# Altium PCB PCB2.PcbDoc
Units mil, origin at the board's own origin, x right, y up, seen from the top; angles counter-clockwise.
Board outline 6000 x 4000 mil, 2 copper layers (Top Layer, Bottom Layer); 80 components, 14 nets, 268 pads, 0 vias.
Unrouted connection lines stored in the file: 4.
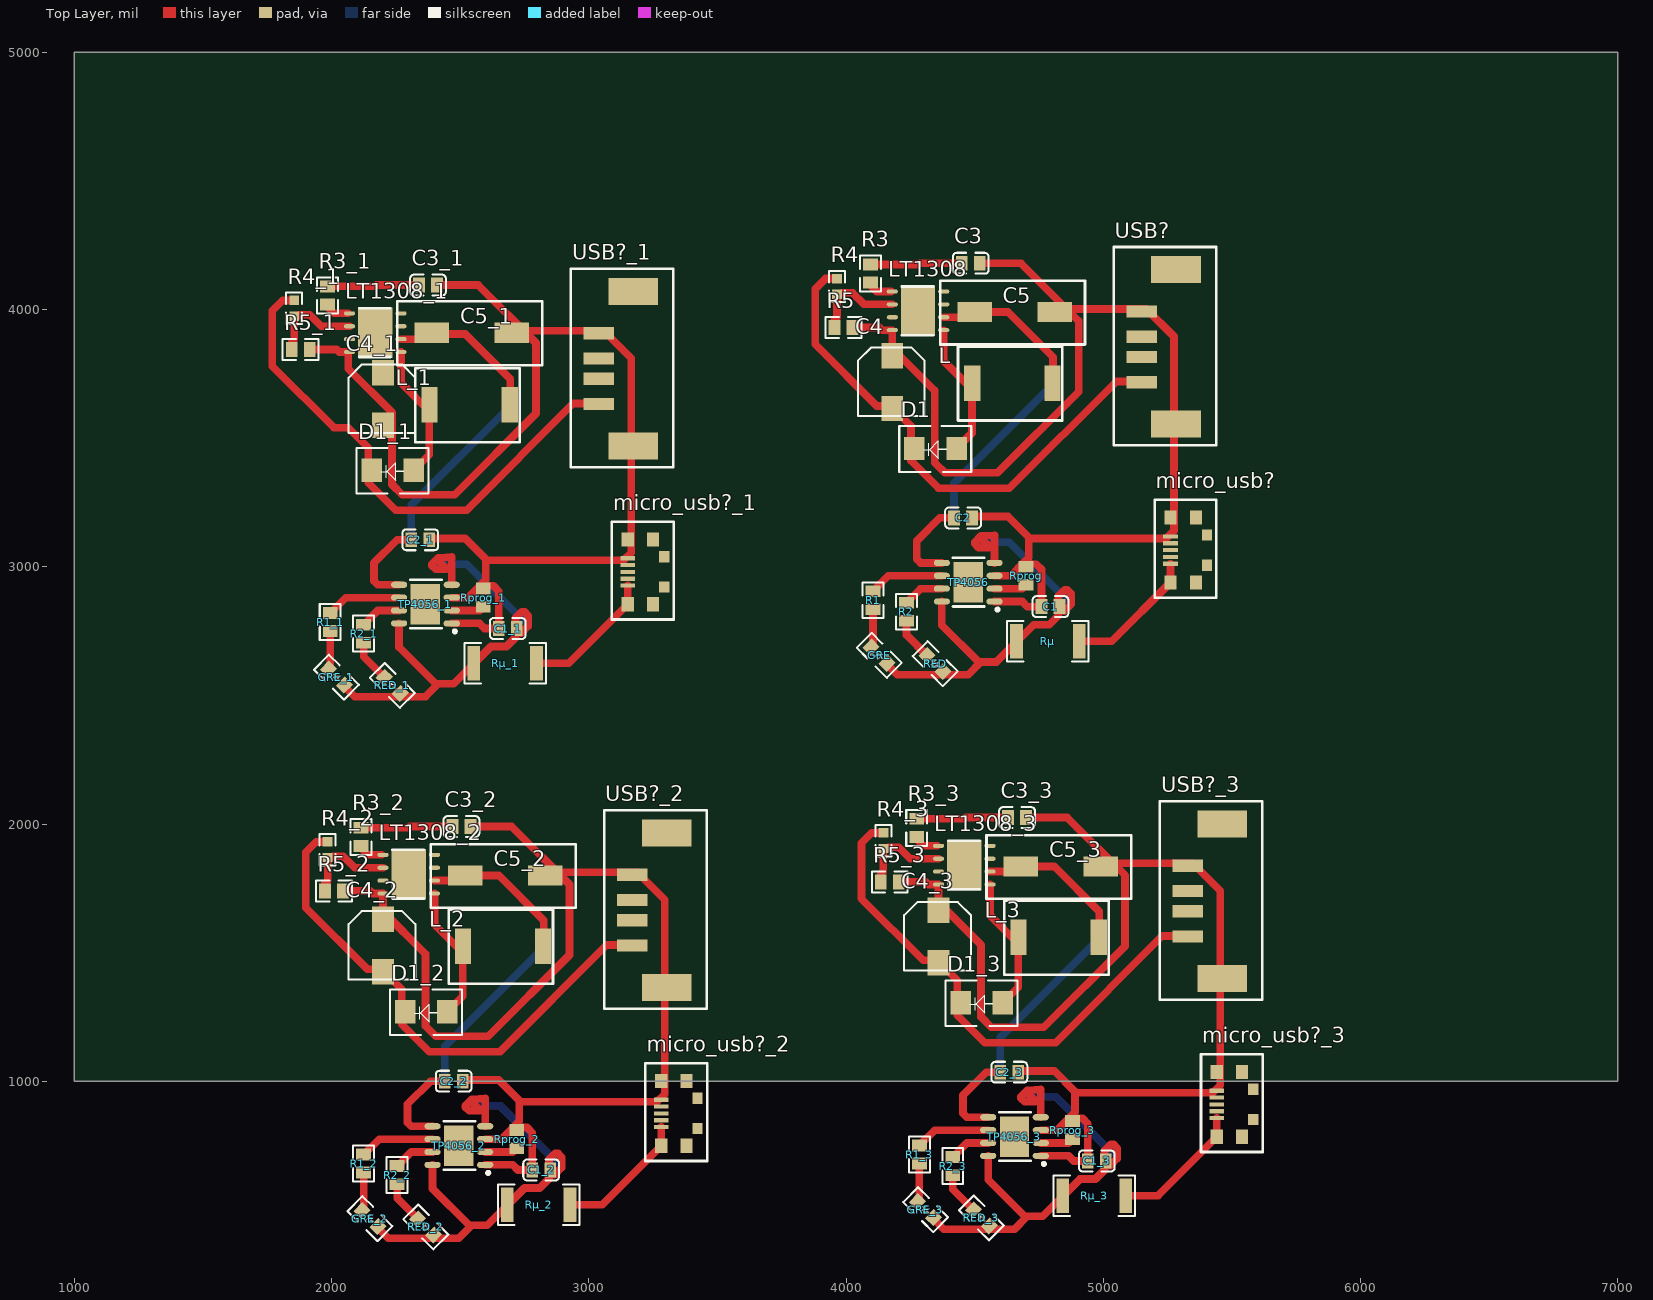
[diagram p0: Top Layer view]
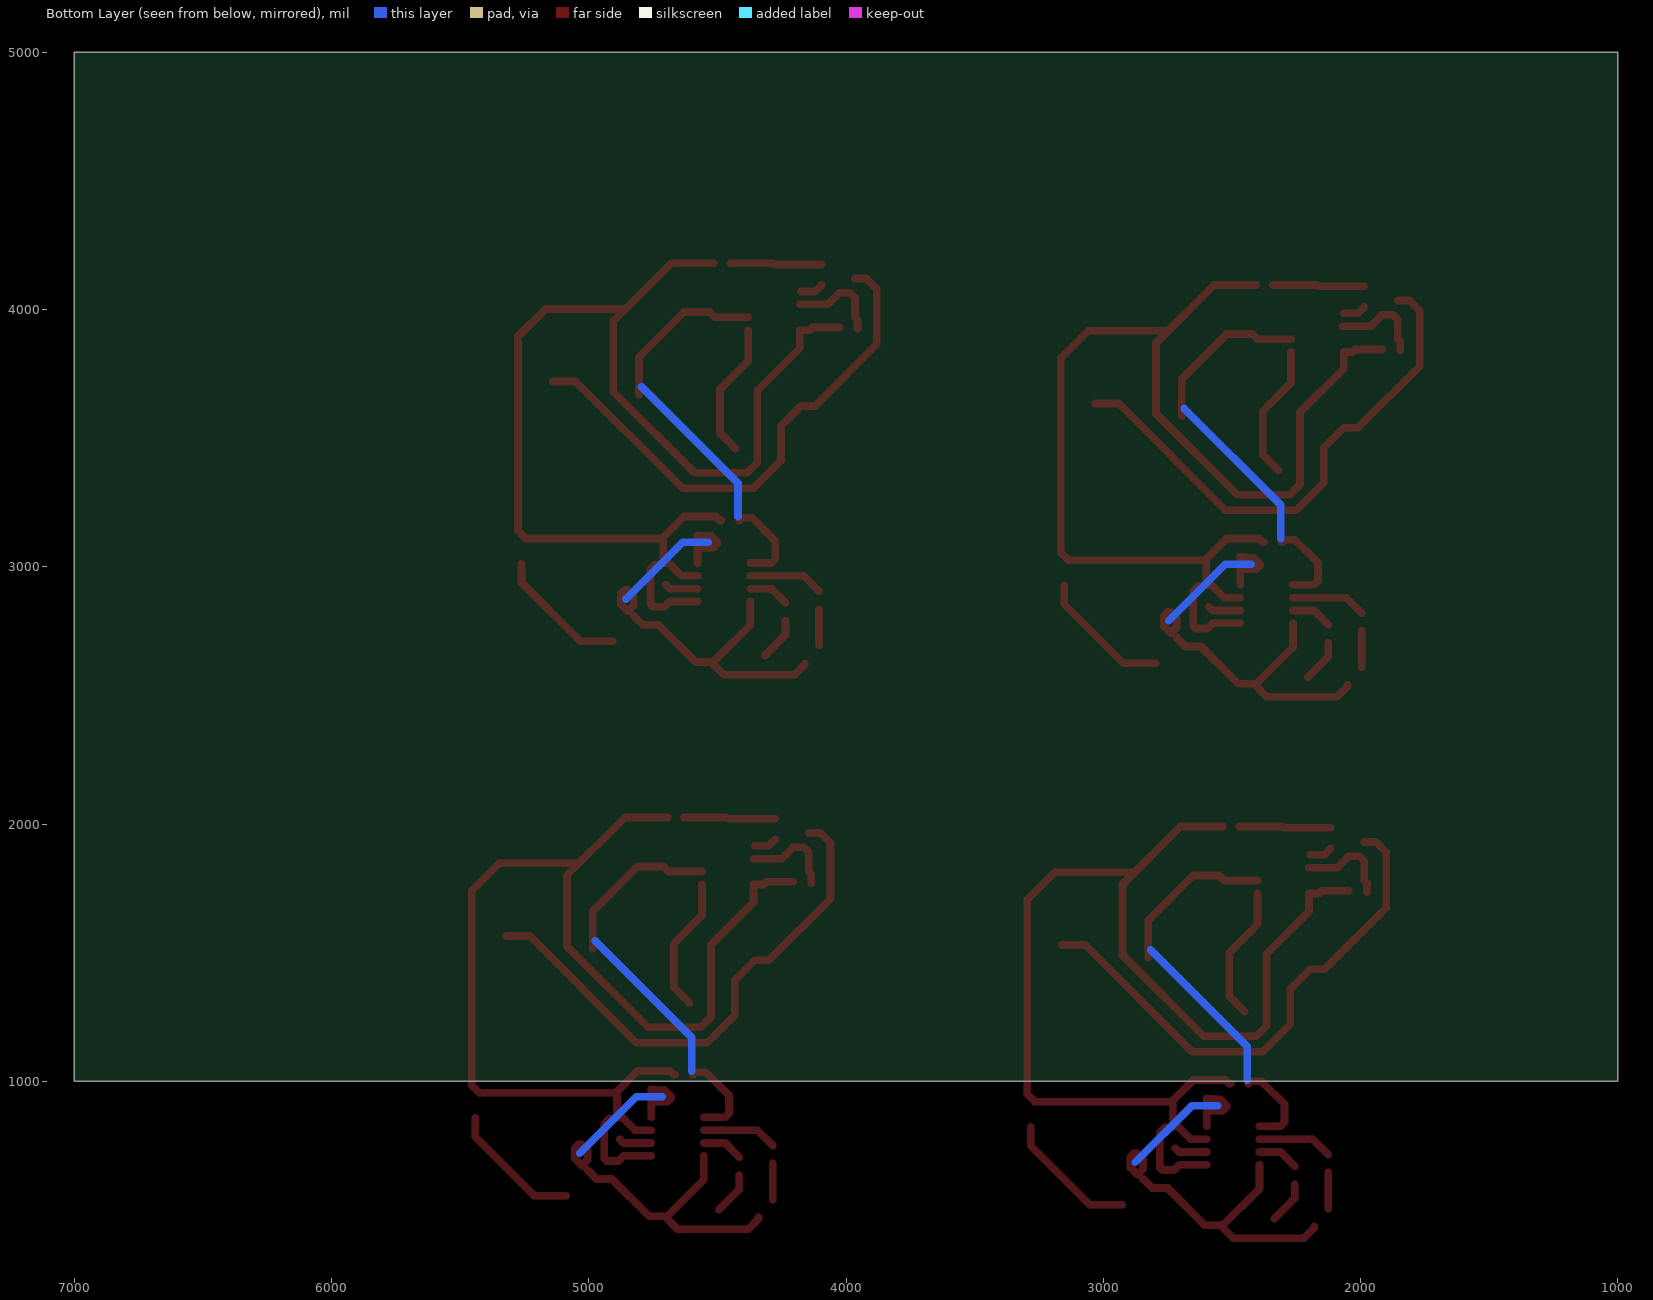
[diagram p1: Bottom Layer view, seen from below]

## Layer stack, top to bottom
Top Solder: solder mask 0.4, Solder Resist, Dk 3.5
Top Layer: signal copper 1.4
Dielectric 1: dielectric 12.6, FR-4, Dk 4.8
Bottom Layer: signal copper 1.4
Bottom Solder: solder mask 0.4, Solder Resist, Dk 3.5

## Board outline
1000,1000 7000,1000 7000,5000 1000,5000

## Design rules (kind name [scope] priority, off if disabled: settings)
Clearance [All] p1: gap=10 ignorepadtopadclearanceinfootprint=FALSE except(0: Arc-Hole Track-Hole SMDPad-Hole THPad-Hole Via-Hole Fill-Hole Poly-Hole Region-Hole Text-Hole)
PolygonConnect [All] p1: connectstyle=Relief reliefconductorwidth=10 reliefentries=4 polygonreliefangle="90 Angle" airgapwidth=10
RoutingVias [All] p1: holewidth=28 width=50 viastyle="Through Hole" minholewidth=28 minwidth=50 maxholewidth=28 maxwidth=50
SolderMaskExpansion [All] p1: expansion=4
Width [All] p1: maxlimit=30 minlimit=10 preferedwidth=30 bottomlayer_maxwidth=10 bottomlayer_prefwidth=10 minimp=50.000000 maximp=50.000000 favimp=50.000000
30 further rules are at their usual default settings.

## Classes and differential pairs
component class Sheet1: C1 C2 C3 C5 D1 GRE L LT1308 micro_usb? R1 R2 R3 R4 RED Rprog Rμ TP4056 USB?

## Components (designator, comment, footprint, x,y, rotation, side; value= is the part's Value field where it differs from the comment)
C1 "10μF" LC-0805_C 4795,2845 r0 top
C1_1 "10μF" LC-0805_C 2685,2760 r0 top (schematic designator C1)
C1_2 "10μF" LC-0805_C 2815,655 r0 top (schematic designator C1)
C1_3 "10μF" LC-0805_C 4975,690 r0 top (schematic designator C1)
C2 "10μF" LC-0805_C 4455,3190 r0 top
C2_1 "10μF" LC-0805_C 2345,3105 r0 top (schematic designator C2)
C2_2 "10μF" LC-0805_C 2475,1000 r0 top (schematic designator C2)
C2_3 "10μF" LC-0805_C 4635,1035 r0 top (schematic designator C2)
C3 "100pF" LC-0805_C 4485,4180 r180 top
C3_1 "100pF" LC-0805_C 2375,4095 r180 top (schematic designator C3)
C3_2 "100pF" LC-0805_C 2505,1990 r180 top (schematic designator C3)
C3_3 "100pF" LC-0805_C 4665,2025 r180 top (schematic designator C3)
C4 "220μF" 220微法 4156.38,3721.57 r0 top
C4_1 "220μF" 220微法 2176.38,3656.3 r0 top (schematic designator C4)
C4_2 "220μF" 220微法 2176.38,1531.57 r0 top (schematic designator C4)
C4_3 "220μF" 220微法 4336.38,1566.57 r0 top (schematic designator C4)
C5 "47μF" 47微法 4669.29,3997.87 r180 top
C5_1 "47μF" 47微法 2559.29,3917.87 r180 top (schematic designator C5)
C5_2 "47μF" 47微法 2689.29,1807.87 r180 top (schematic designator C5)
C5_3 "47μF" 47微法 4849.29,1842.87 r180 top (schematic designator C5)
D1 "D1" 肖特基二极管 4348,3460 r180 top
D1_1 "D1" 肖特基二极管 2238,3375 r180 top (schematic designator D1)
D1_2 "D1" 肖特基二极管 2368,1270 r180 top (schematic designator D1)
D1_3 "D1" 肖特基二极管 4528,1305 r180 top (schematic designator D1)
GRE "绿" 0805D 4160,2625 r135 top (schematic designator LED绿)
GRE_1 "绿" 0805D 2050,2540 r135 top (schematic designator LED绿)
GRE_2 "绿" 0805D 2180,435 r135 top (schematic designator LED绿)
GRE_3 "绿" 0805D 4340,470 r135 top (schematic designator LED绿)
L "4.7μH" 4.7微亨 4715,3730 r90 top
L_1 "4.7μH" 4.7微亨 2605,3645 r90 top (schematic designator L)
L_2 "4.7μH" 4.7微亨 2735,1540 r90 top (schematic designator L)
L_3 "4.7μH" 4.7微亨 4895,1575 r90 top (schematic designator L)
LT1308 "LT1308" LT1308 4280,3995 r270 top
LT1308_1 "LT1308" LT1308 2170,3910 r270 top (schematic designator LT1308)
LT1308_2 "LT1308" LT1308 2300,1805 r270 top (schematic designator LT1308)
LT1308_3 "LT1308" LT1308 4460,1840 r270 top (schematic designator LT1308)
micro_usb? "micro_usb" micro_USB 5360,3065 r90 top
micro_usb?_1 "micro_usb" micro_USB 3250,2980 r90 top (schematic designator micro_usb?)
micro_usb?_2 "micro_usb" micro_USB 3380,875 r90 top (schematic designator micro_usb?)
micro_usb?_3 "micro_usb" micro_USB 5540,910 r90 top (schematic designator micro_usb?)
R1 "1k" LC-0805_R 4105,2870 r270 top
R1_1 "1k" LC-0805_R 1995,2785 r270 top (schematic designator R1)
R1_2 "1k" LC-0805_R 2125,680 r270 top (schematic designator R1)
R1_3 "1k" LC-0805_R 4285,715 r270 top (schematic designator R1)
R2 "1k" LC-0805_R 4235,2824.96 r270 top
R2_1 "1k" LC-0805_R 2125,2739.96 r270 top (schematic designator R2)
R2_2 "1k" LC-0805_R 2255,634.96 r270 top (schematic designator R2)
R2_3 "1k" LC-0805_R 4415,669.96 r270 top (schematic designator R2)
R3 "47K" LC-0805_R 4095,4139.96 r90 top
R3_1 "47K" LC-0805_R 1985,4054.96 r90 top (schematic designator R3)
R3_2 "47K" LC-0805_R 2115,1949.96 r90 top (schematic designator R3)
R3_3 "47K" LC-0805_R 4275,1984.96 r90 top (schematic designator R3)
R4 "309k" LC-0603_R 3965,4090 r90 top
R4_1 "309k" LC-0603_R 1855,4005 r90 top (schematic designator R4)
R4_2 "309k" LC-0603_R 1985,1900 r90 top (schematic designator R4)
R4_3 "309k" LC-0603_R 4145,1935 r90 top (schematic designator R4)
R5 "100k" LC-0805_R 3990,3930 r180 top
R5_1 "100k" LC-0805_R 1880,3845 r180 top (schematic designator R5)
R5_2 "100k" LC-0805_R 2010,1740 r180 top (schematic designator R5)
R5_3 "100k" LC-0805_R 4170,1775 r180 top (schematic designator R5)
RED "红" 0805D 4377.23,2592.77 r135 top (schematic designator LED)
RED_1 "红" 0805D 2267.23,2507.77 r135 top (schematic designator LED)
RED_2 "红" 0805D 2397.23,402.77 r135 top (schematic designator LED)
RED_3 "红" 0805D 4557.23,437.77 r135 top (schematic designator LED)
Rprog "1.2k" LC-0805 4700,2965 r90 top
Rprog_1 "1.2k" LC-0805 2590,2880 r90 top (schematic designator Rprog)
Rprog_2 "1.2k" LC-0805 2720,775 r90 top (schematic designator Rprog)
Rprog_3 "1.2k" LC-0805 4880,810 r90 top (schematic designator Rprog)
Rμ "0.43" LC-2512_R 4785,2710 r180 top
Rμ_1 "0.43" LC-2512_R 2675,2625 r180 top (schematic designator Rμ)
Rμ_2 "0.43" LC-2512_R 2805,520 r180 top (schematic designator Rμ)
Rμ_3 "0.43" LC-2512_R 4965,555 r180 top (schematic designator Rμ)
TP4056 "TP4056" LC-SOP-8_EP_150mil 4475,2940 r90 top (schematic designator *)
TP4056_1 "TP4056" LC-SOP-8_EP_150mil 2365,2855 r90 top (schematic designator *)
TP4056_2 "TP4056" LC-SOP-8_EP_150mil 2495,750 r90 top (schematic designator *)
TP4056_3 "TP4056" LC-SOP-8_EP_150mil 4655,785 r90 top (schematic designator *)
USB? "USB" 贴片_USB 5090,3855 r270 top
USB?_1 "USB" 贴片_USB 2980,3770 r270 top (schematic designator USB?)
USB?_2 "USB" 贴片_USB 3110,1665 r270 top (schematic designator USB?)
USB?_3 "USB" 贴片_USB 5270,1700 r270 top (schematic designator USB?)

## Footprints (in the part's own frame and the unit in brackets; to place one, negate y for a bottom-side part, rotate by r counter-clockwise, add the part's x,y. Pads: shape width x height; smd on the part's side, far side on the other; paste and mask are expansions set on the pad)
4.7微亨 [mm]
  rect 3.5x1.6 smd: 1(-0.4,-2.225) 2(-0.4,5.7)
  silkscreen extent -4.1,-3.2 3.2,7.1
47微法 [mm]
  rect 3.4x2 smd: 1(4.3,0.2) 2(-3.6,0.2)
  silkscreen extent -6.6,-2.9 7.7,3.4
220微法 [mm] "Aluminum Electrolytic Capacitor, Body 4.30x4.30x6.30mm, IPC Low Density"
  rect 2.15x2.5 smd: 1(0.6,2.5) 2(0.6,-2.7)
  silkscreen extent -2.8,-3.5 3.8,3.3, body extent -2.7,-3.4 3.9,3.2, height 6.3
0805D [mil]
  rect 45x50 smd: A(0,0) K(88,0)
  silkscreen extent -39,-41 126,41
LC-0603_R [mm]
  rect 0.93x0.98 smd: 1(-0.77,0) 2(0.77,0)
  silkscreen extent -1.53,-0.79 1.54,0.79, body extent -0.85,-0.4 0.85,0.4, height 0.56
LC-0805 [mm]
  rect 1.16x1.47 smd: 1(-0.89,0) 2(0.89,0)
LC-0805_C [mm]
  rect 1.16x1.47 smd: 1(-0.89,0) 2(0.89,0)
  silkscreen extent -1.77,-1.04 1.77,1.04, body extent -1,-0.62 1,0.63, height 0.77
LC-0805_R [mm]
  rect 1.16x1.47 smd: 1(-0.89,0) 2(0.89,0)
  silkscreen extent -1.77,-1.03 1.77,1.03, body extent -1,-0.62 1,0.63, height 0.49
LC-2512_R [mm]
  rect 1.25x3.42 smd: 1(-3.1,0) 2(3.1,0)
  silkscreen extent -4.02,-2.01 4.03,2.01, body extent -3.16,-1.6 3.16,1.6, height 0.62
LC-SOP-8_EP_150mil [mm]
  rect 4x2.9 smd: 0(0,0)
  oval 0.6x1.6 smd: 1(-1.905,-2.6) 2(-0.635,-2.6) 3(0.635,-2.6) 4(1.905,-2.6) 5(1.905,2.6) 6(0.635,2.6) 7(-0.635,2.6) 8(-1.905,2.6)
  silkscreen extent -2.85,-3.05 2.4,1.5
LT1308 [mm]
  rect 5x3.4 smd: 0(0,0)
  oval 0.4x1.1 smd: 1(-1.905,-2.54) 2(-0.635,-2.54) 3(0.635,-2.54) 4(1.905,-2.54) 5(1.905,2.54) 6(0.635,2.54) 7(-0.635,2.54) 8(-1.905,2.54)
  silkscreen extent -2.4,-1.6 2.4,1.5
micro_USB [mil]
  rect 16.32x57.14 smd: 1(-53,98.42) 2(-26.5,98.42) 3(0,98.42) 4(26.5,98.42) 5(53,98.42)
  rect 55.12x47.24 smd: 6(-126,98.42) 7(-126,0) 8(126,98.42) 9(126,0)
  rect 43.3x39.37 smd: 10(-59.06,-43.31) 11(59.06,-43.31)
  silkscreen extent -185,-80 195,160
肖特基二极管 [mil]
  rect 80x90 smd: 1(-82,0) 2(82,0)
  silkscreen extent -139,-87 141,91
贴片_USB [mm]
  rect 1.2x3 smd: 1(-3.5,1.5) 2(-1,1.5) 3(1,1.5) 4(3.5,1.5)
  rect 2.65x4.9 smd: 5(-7.625,4.9) 6(7.625,4.9)
  silkscreen extent -9.86,-1.26 9.73,8.86

## Part data
C1 C1_1 C1_2 C1_3 C2 C2_1 C2_2 C2_3 C3 C3_1 C3_2 C3_3: library part 电容
C4 C4_1 C4_2 C4_3 C5 C5_1 C5_2 C5_3: library part CD, "电解电容"
GRE GRE_1 GRE_2 GRE_3 RED RED_1 RED_2 RED_3: library part LED, "LED发光管"
L L_1 L_2 L_3: library part 空心电感
R1 R1_1 R1_2 R1_3 R2 R2_1 R2_2 R2_3 R3 R3_1 R3_2 R3_3 R4 R4_1 R4_2 R4_3 R5 R5_1 R5_2 R5_3 Rprog Rprog_1 Rprog_2 Rprog_3 Rμ Rμ_1 Rμ_2 Rμ_3: library part R, "电阻"

## Nets (pads, with @x,y where several pads share a name; then routed paths per layer and width w, separated by ;. In a path a pad name is that pad's centre, name@x,y a point inside that pad or via, vN(x,y) a via of type N, cw(c..) or ccw(c..) an arc to the next point about the centre after c; other vN are vias at no path point)
GND: C1.1 C2.2 C3.1 C4.1 C5.2 LT1308.4 micro_usb?.4 micro_usb?.5 micro_usb?.8 R5.1 Rprog.2 TP4056.1 TP4056.3 USB?.1 USB?.6 | length 4906.8
  Top Layer w30: R5.1 4130,3930 4140,3920 LT1308.4 4180,3850 4345,3685 4345,3405 4385,3365 4589.1,3365 4905,3680.9 4905,3955 4680,4180 C3.1 C3.1@4515,4180 ; C2.2@4485.04,3180 4490.04,3180 4505.04,3195 4630,3195 4710,3115 4710,3110 ; TP4056.1 4685,2865 4705,2845 4750,2845 4760,2855 4760,2990 4739.92,3010.08 4705.34,3013.49 4701.36,3013.88 Rprog.2@4690,3015 ; TP4056.3 4640,2965 Rprog.2@4690,3015 ; C5.2@4866.73,4002.13 5167.87,4002.13 5275,3895 5275,3140 5245,3110 4710,3110 ; Rprog.2@4690,3015 4710,3035 4710,3110
Net*_2: Rprog.1 TP4056.2 | length 128.8
  Top Layer w30: TP4056.2 4685.04,2915 Rprog.1
Net*_4: C1.2 GRE.A RED.A Rμ.2 TP4056.4 TP4056.8 | length 1593.8
  Top Layer w30: GRE.A 4160,2620 4200,2580 4475,2580 4525,2630 4585,2630 4730,2775 4790,2775 4825,2810 ; TP4056.8 4372.64,2772.36 4515,2630 ; 4530,3105 4550,3085 4550,3080 4555,3075 4515,3075 4500,3090 4500,3095 4525,3120 4577.36,3122.64 ; 4574.72,3120 4577.36,3122.64 ; TP4056.4 4577.36,3122.64 ; C1.2@4825,2850.04 C1.2 4847.52,2827.52 4875,2855 4875,2895 4860,2910 4850,2910 4825,2885 C1.2@4825,2850.04
Net*_5: C2.1 C5.1 L.1 LT1308.6 TP4056.5 | length 1672.2
  Top Layer w30: TP4056.5 4290,3015 4275,3030 4275,3100 4365,3190 4414.96,3190 C2.1@4414.96,3180 ; LT1308.6 4510,3970 4530,3990 4630,3990 4805,3815 L.1@4805,3670
  Bottom Layer w30: 4420,3195 4420,3325 4795,3700
Net*_6: R1.1 TP4056.6 | length 292.5
  Top Layer w30: R1.1 4164.96,2965 TP4056.6
Net*_7: R2.1 TP4056.7 | length 160.4
  Top Layer w30: R2.1 4290,2915 TP4056.7
NetC3_2: C3.2 R3.2 | length 357
  Top Layer w30: R3.2 4280,4175 4285,4180 C3.2
NetC4_1: C4.2 D1.2 R4.2 USB?.4 | length 2059.6
  Top Layer w30: R4.2 3920.32,4120.32 3880,4080 3880,3865 4120,3625 4175,3625 4253,3547 4253,3412 4360,3305 4635,3305 5050,3720 USB?.4@5140,3720
NetD1_1: D1.1 L.2 LT1308.5 | length 530.4
  Top Layer w30: LT1308.5 4380,3800 4490,3690 4490,3520 D1.1
NetLED_K: R2.2 RED.K | length 168.1
  Top Layer w30: R2.2 4235,2735 RED.K
NetLED绿_K: GRE.K R1.2 | length 140.5
  Top Layer w30: GRE.K@4105,2694.45 R1.2
NetLT1308_1: LT1308.1 R3.1 | length 90.4
  Top Layer w30: R3.1@4095,4095 4120,4070 LT1308.1@4175,4070
NetLT1308_2: LT1308.2 R4.1 R5.2 | length 366.1
  Top Layer w30: R5.2@3955,3925 3955,3960 3965,3970 3965,4045 3985,4065 4025,4065 4070,4020 LT1308.2
Netmicro_usb?_1: micro_usb?.1 micro_usb?.2 micro_usb?.6 Rμ.1 | length 522.4
  Top Layer w30: Rμ.1 5032.58,2710 micro_usb?.6 micro_usb?.1
pads on no net: C1_1.1 C1_1.2 C1_2.1 C1_2.2 C1_3.1 C1_3.2 C2_1.1 C2_1.2 C2_2.1 C2_2.2 C2_3.1 C2_3.2 C3_1.1 C3_1.2 C3_2.1 C3_2.2 C3_3.1 C3_3.2 C4_1.1 C4_1.2 C4_2.1 C4_2.2 C4_3.1 C4_3.2 C5_1.1 C5_1.2 C5_2.1 C5_2.2 C5_3.1 C5_3.2 D1_1.1 D1_1.2 D1_2.1 D1_2.2 D1_3.1 D1_3.2 GRE_1.A GRE_1.K GRE_2.A GRE_2.K GRE_3.A GRE_3.K L_1.1 L_1.2 L_2.1 L_2.2 L_3.1 L_3.2 LT1308.0 LT1308.3 LT1308.7 LT1308.8 LT1308_1.0 LT1308_1.1 LT1308_1.2 LT1308_1.3 LT1308_1.4 LT1308_1.5 LT1308_1.6 LT1308_1.7 LT1308_1.8 LT1308_2.0 LT1308_2.1 LT1308_2.2 LT1308_2.3 LT1308_2.4 LT1308_2.5 LT1308_2.6 LT1308_2.7 LT1308_2.8 LT1308_3.0 LT1308_3.1 LT1308_3.2 LT1308_3.3 LT1308_3.4 LT1308_3.5 LT1308_3.6 LT1308_3.7 LT1308_3.8 micro_usb?.3 micro_usb?.7 micro_usb?.9 micro_usb?.10 micro_usb?.11 micro_usb?_1.1 micro_usb?_1.2 micro_usb?_1.3 micro_usb?_1.4 micro_usb?_1.5 micro_usb?_1.6 micro_usb?_1.7 micro_usb?_1.8 micro_usb?_1.9 micro_usb?_1.10 micro_usb?_1.11 micro_usb?_2.1 micro_usb?_2.2 micro_usb?_2.3 micro_usb?_2.4 micro_usb?_2.5 micro_usb?_2.6 micro_usb?_2.7 micro_usb?_2.8 micro_usb?_2.9 micro_usb?_2.10 micro_usb?_2.11 micro_usb?_3.1 micro_usb?_3.2 micro_usb?_3.3 micro_usb?_3.4 micro_usb?_3.5 micro_usb?_3.6 micro_usb?_3.7 micro_usb?_3.8 micro_usb?_3.9 micro_usb?_3.10 micro_usb?_3.11 R1_1.1 R1_1.2 R1_2.1 R1_2.2 R1_3.1 R1_3.2 R2_1.1 R2_1.2 R2_2.1 R2_2.2 R2_3.1 R2_3.2 R3_1.1 R3_1.2 R3_2.1 R3_2.2 R3_3.1 R3_3.2 R4_1.1 R4_1.2 R4_2.1 R4_2.2 R4_3.1 R4_3.2 R5_1.1 R5_1.2 R5_2.1 R5_2.2 R5_3.1 R5_3.2 RED_1.A RED_1.K RED_2.A RED_2.K RED_3.A RED_3.K Rprog_1.1 Rprog_1.2 Rprog_2.1 Rprog_2.2 Rprog_3.1 Rprog_3.2 Rμ_1.1 Rμ_1.2 Rμ_2.1 Rμ_2.2 Rμ_3.1 Rμ_3.2 TP4056.0 TP4056_1.0 TP4056_1.1 TP4056_1.2 TP4056_1.3 TP4056_1.4 TP4056_1.5 TP4056_1.6 TP4056_1.7 TP4056_1.8 TP4056_2.0 TP4056_2.1 TP4056_2.2 TP4056_2.3 TP4056_2.4 TP4056_2.5 TP4056_2.6 TP4056_2.7 TP4056_2.8 TP4056_3.0 TP4056_3.1 TP4056_3.2 TP4056_3.3 TP4056_3.4 TP4056_3.5 TP4056_3.6 TP4056_3.7 TP4056_3.8 USB?.2 USB?.3 USB?.5 USB?_1.1 USB?_1.2 USB?_1.3 USB?_1.4 USB?_1.5 USB?_1.6 USB?_2.1 USB?_2.2 USB?_2.3 USB?_2.4 USB?_2.5 USB?_2.6 USB?_3.1 USB?_3.2 USB?_3.3 USB?_3.4 USB?_3.5 USB?_3.6
copper on no net: | length 40608.4
  Top Layer w30: 1845,3840 1845,3875 1855,3885 1855,3960 1875,3980 1915,3980 1960,3935 2070,3935 ; 1855,4035.32 1810.32,4035.32 1770,3995 1770,3780 2010,3540 2065,3540 2143,3462 2143,3327 2250,3220 2525,3220 2940,3635 3030,3635 ; 1915.04,3845 2020,3845 2030,3835 2065,3835 2065,3770 2235,3600 2235,3320 2275,3280 2479.1,3280 2795,3595.9 2795,3870 2570,4095 2410.04,4095 2405,4095 ; 1975,1735 1975,1770 1985,1780 1985,1855 2005,1875 2045,1875 2090,1830 2200,1830 ; 1985,1930.32 1940.32,1930.32 1900,1890 1900,1675 2140,1435 2195,1435 2273,1357 2273,1222 2380,1115 2655,1115 3070,1530 3160,1530 ; 1985,4010 2010,3985 2065,3985 ; 1985,4090 2170,4090 2175,4095 2339.96,4095 ; 1995,2609.45 1995,2749.96 ; 1995,2820.04 2054.96,2880 2262.64,2880 ; 2045.04,1740 2150,1740 2160,1730 2200,1730 2200,1660 2365,1495 2365,1215 2405,1175 2609.1,1175 2925,1490.9 2925,1765 2700,1990 2540.04,1990 2535,1990 ; 2050,2540 2050,2535 2090,2495 2365,2495 2415,2545 2475,2545 2620,2690 2680,2690 2715,2725 ; 2115,1905 2140,1880 2195,1880 ; 2115,1985 2300,1985 2305,1990 2469.96,1990 ; 2125,504.45 2125,644.96 ; 2125,715.04 2184.96,775 2392.64,775 ; 2125,2704.92 2125,2650 2205,2570 ; 2125,2775 2180,2830 2262.64,2830 ; 2180,435 2180,430 2220,390 2495,390 2545,440 2605,440 2750,585 2810,585 2845,620 ; 2255,599.92 2255,545 2335,465 ; 2255,670 2310,725 2392.64,725 ; 2262.64,2780 2262.64,2687.36 2405,2545 ; 2262.64,2930 2180,2930 2165,2945 2165,3015 2255,3105 2304.96,3105 2304.96,3095 ; 2270,3835 2270,3715 2380,3605 2380,3435 2320,3375 ; 2270,3885 2400,3885 2420,3905 2520,3905 2695,3730 2695,3585 ; 2375.04,3095 2380.04,3095 2395.04,3110 2520,3110 2600,3030 2600,3025 ; 2392.64,675 2392.64,582.36 2535,440 ; 2392.64,825 2310,825 2295,840 2295,910 2385,1000 2434.96,1000 2434.96,990 ; 2400,1730 2400,1610 2510,1500 2510,1330 2450,1270 ; 2400,1780 2530,1780 2550,1800 2650,1800 2825,1625 2825,1480 ; 2420,3020 2440,3000 2440,2995 2445,2990 2405,2990 2390,3005 2390,3010 2415,3035 2467.36,3037.64 ; 2464.72,3035 2467.36,3037.64 ; 2467.36,2780 2575,2780 2595,2760 2640,2760 2650,2770 2650,2905 2629.92,2925.08 2595.34,2928.49 2591.36,2928.88 2580,2930 ; 2467.36,2830 2575.04,2830 2590,2844.96 ; 2467.36,2880 2530,2880 2580,2930 ; 2467.36,2930 2467.36,3037.64 ; 2505.04,990 2510.04,990 2525.04,1005 2650,1005 2730,925 2730,920 ; 2550,915 2570,895 2570,890 2575,885 2535,885 2520,900 2520,905 2545,930 2597.36,932.64 ; 2594.72,930 2597.36,932.64 ; 2597.36,675 2705,675 2725,655 2770,655 2780,665 2780,800 2759.92,820.08 2725.34,823.49 2721.36,823.88 2710,825 ; 2597.36,725 2705.04,725 2720,739.96 ; 2597.36,775 2660,775 2710,825 ; 2597.36,825 2597.36,932.64 ; 2756.73,3917.13 3057.87,3917.13 3165,3810 3165,3055 3135,3025 2600,3025 ; 2797.05,2625 2922.58,2625 3151.58,2854 3151.58,2927 ; 2886.73,1812.13 3187.87,1812.13 3295,1705 3295,950 3265,920 2730,920 ; 2927.05,520 3052.58,520 3281.58,749 3281.58,822 ; 4135,1770 4135,1805 4145,1815 4145,1890 4165,1910 4205,1910 4250,1865 4360,1865 ; 4145,1965.32 4100.32,1965.32 4060,1925 4060,1710 4300,1470 4355,1470 4433,1392 4433,1257 4540,1150 4815,1150 5230,1565 5320,1565 ; 4205.04,1775 4310,1775 4320,1765 4360,1765 4360,1695 4525,1530 4525,1250 4565,1210 4769.1,1210 5085,1525.9 5085,1800 4860,2025 4700.04,2025 4695,2025 ; 4275,1940 4300,1915 4355,1915 ; 4275,2020 4460,2020 4465,2025 4629.96,2025 ; 4285,539.45 4285,679.96 ; 4285,750.04 4344.96,810 4552.64,810 ; 4340,470 4340,465 4380,425 4655,425 4705,475 4765,475 4910,620 4970,620 5005,655 ; 4415,634.92 4415,580 4495,500 ; 4415,705 4470,760 4552.64,760 ; 4552.64,710 4552.64,617.36 4695,475 ; 4552.64,860 4470,860 4455,875 4455,945 4545,1035 4594.96,1035 4594.96,1025 ; 4560,1765 4560,1645 4670,1535 4670,1365 4610,1305 ; 4560,1815 4690,1815 4710,1835 4810,1835 4985,1660 4985,1515 ; 4665.04,1025 4670.04,1025 4685.04,1040 4810,1040 4890,960 4890,955 ; 4710,950 4730,930 4730,925 4735,920 4695,920 4680,935 4680,940 4705,965 4757.36,967.64 ; 4754.72,965 4757.36,967.64 ; 4757.36,710 4865,710 4885,690 4930,690 4940,700 4940,835 4919.92,855.08 4885.34,858.49 4881.36,858.88 4870,860 ; 4757.36,760 4865.04,760 4880,774.96 ; 4757.36,810 4820,810 4870,860 ; 4757.36,860 4757.36,967.64 ; 5046.73,1847.13 5347.87,1847.13 5455,1740 5455,985 5425,955 4890,955 ; 5087.05,555 5212.58,555 5441.58,784 5441.58,857 ; 2580,2930 2600,2950 2600,3025 ; 2710,825 2730,845 2730,920 ; 4870,860 4890,880 4890,955 ; 2715,2765.04 2715,2800 2740,2825 2750,2825 2765,2810 2765,2770 2737.52,2742.52 2720.04,2760 2715,2765.04 ; 2845,660.04 2845,695 2870,720 2880,720 2895,705 2895,665 2867.52,637.52 2850.04,655 2845,660.04 ; 5005,695.04 5005,730 5030,755 5040,755 5055,740 5055,700 5027.52,672.52 5010.04,690 5005,695.04
  Bottom Layer w30: 2310,3110 2310,3240 2685,3615 ; 2425,3010 2525,3010 2745,2790 ; 2440,1005 2440,1135 2815,1510 ; 2555,905 2655,905 2875,685 ; 4535,3095 4635,3095 4855,2875 ; 4600,1040 4600,1170 4975,1545 ; 4715,940 4815,940 5035,720